# EAGLE board Layout (EAGLE 9.1.3)
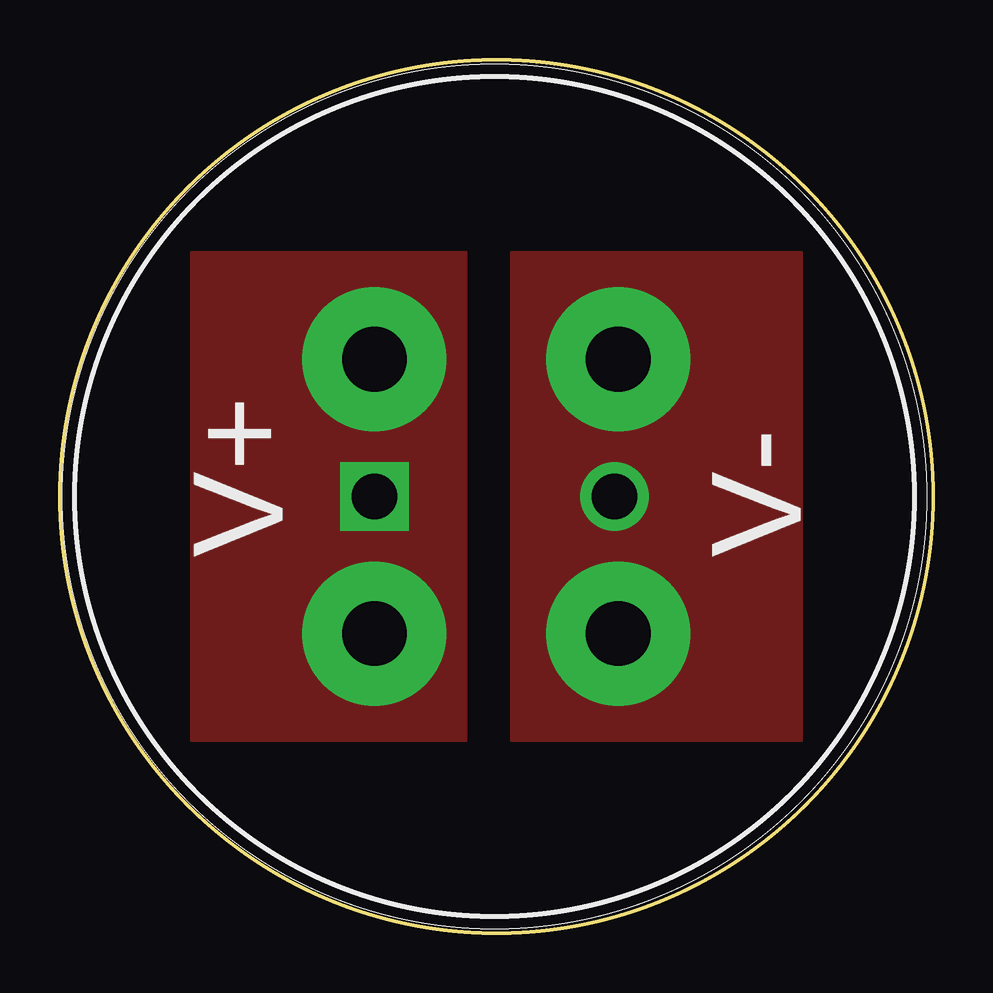
[diagram p0: board, top side]
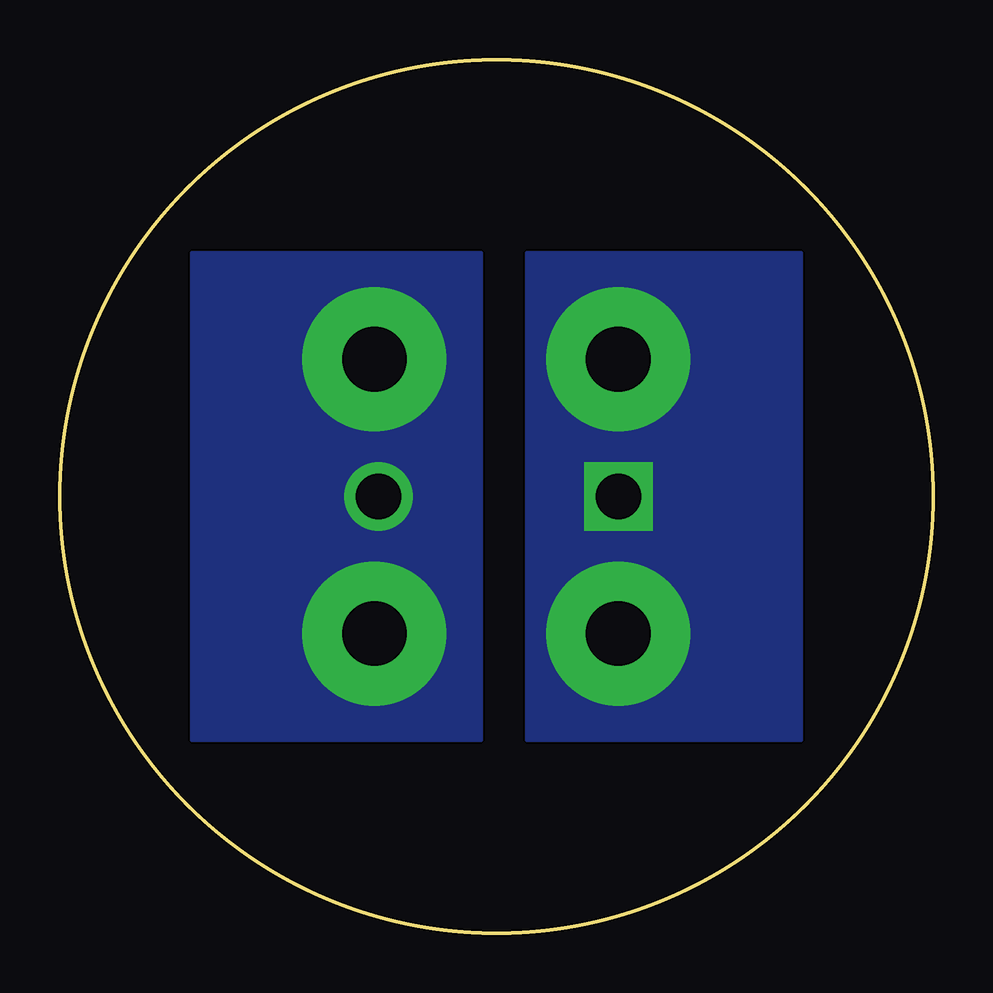
[diagram p1: board, bottom side, seen from below]

Size 36.37 x 36.37 mm. Coordinates in mm from the lower left corner, seen from the top.
Outline: circle at 18.18,18.18 radius 18.18
Copper layers (1*16): Top 0.035mm / dielectric 1.5mm / Bottom 0.035mm
Design rules "default *": minimum track width 6mil, minimum drill 0.35mm, track to track 6mil, track to pad 6mil, pad to pad 6mil, via to via 40mil, smd to smd 6mil, copper to edge 40mil, drill to drill 6mil, minimum pad ring 10mil, minimum via ring 8mil, stop-mask expansion 4mil, vias tented up to drill 0mil, thermal gap 0mil

## Footprints (pad centres in the part's own frame; a part is rotated, then mirrored left to right if it is on the bottom)
CAPPRD1000W170D3500H5500 = drill 1.9 pad 2.85 square: 1 0,0 | drill 1.9 pad 2.85: 2 10,0

## Placement (x,y rotation side)
C1  B43630A5108M000  [CAPPRD1000W170D3500H5500]  13.1,18.18 0 top

## Library data of the parts
C1 = B43630A5108M000; ARROW_PART_NUMBER: B43630A5108M000; DESCRIPTION: EPCOS - B43630A5108M000 - CAP, 1000F, 450V, ALU ELEC, SNAP-IN; HEIGHT: 55mm; MANUFACTURER_NAME: EPCOS; MANUFACTURER_PART_NUMBER: B43630A5108M000; MOUSER_PART_NUMBER: 871-B43630A5108M000; MOUSER_PRICE-STOCK: https://www.mouser.co.uk/ProductDetail/EPCOS-TDK/B43630A5108M000?qs=GG15fDrrStr2jMk4txCBNQ%3D%3D

## Nets
V+: C1.1
V-: C1.2

## Tracks (layer width: path | path; a pad name or v marks a point on that pad's centre or on a via)
V+  (via drill 2.7 pad 6)
  other vias: 13.1,12.47 13.1,23.9
  pour Top: 5.48,28.34 16.91,28.34 16.91,8.02 5.48,8.02
  pour Bottom: 5.48,28.34 16.91,28.34 16.91,8.02 5.48,8.02
V-  (via drill 2.7 pad 6)
  other vias: 23.26,12.47 23.26,23.9
  pour Bottom: 18.82,28.34 30.88,28.34 30.88,8.02 18.82,8.02
  pour Top: 18.82,28.34 18.82,8.02 30.88,8.02 30.88,28.34

## Text on the board
tPlace: V+ | V-